# Altium PCB Espectrometro.PcbDoc
Units mil, origin at the board's own origin, x right, y up, seen from the top; angles counter-clockwise.
Board outline 4010.02 x 6700.02 mil, 2 copper layers (Top Layer, Bottom Layer); 5 components, 20 nets, 126 pads, 2 vias.
Unrouted connection lines stored in the file: 5.
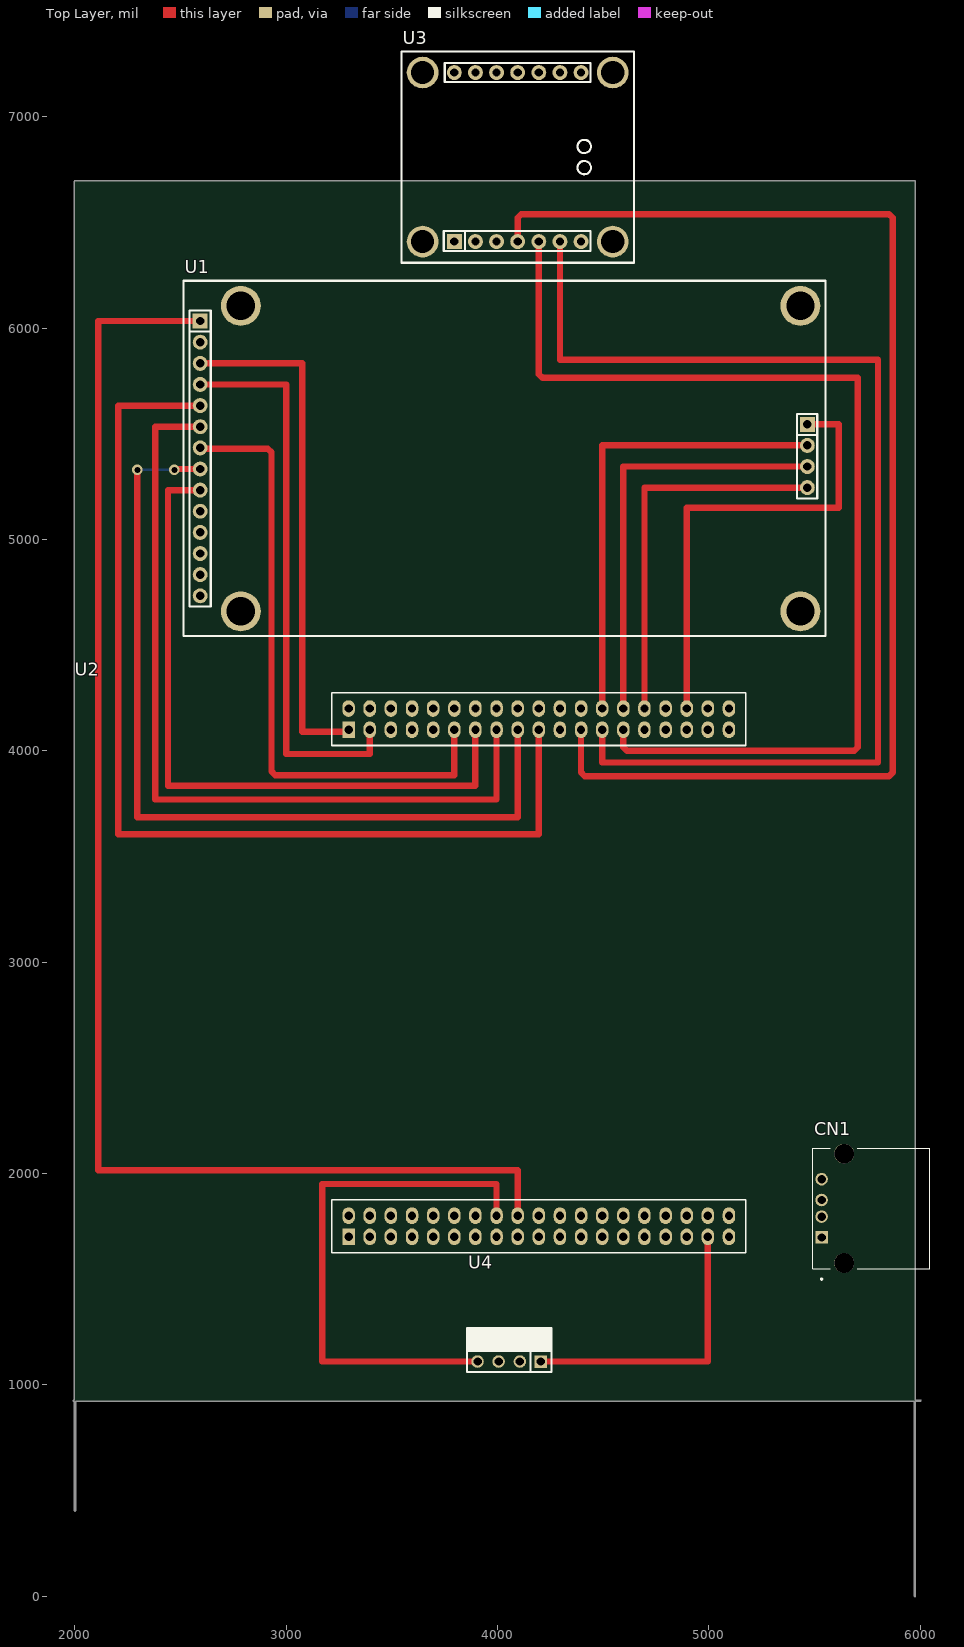
[diagram p0: Top Layer view]
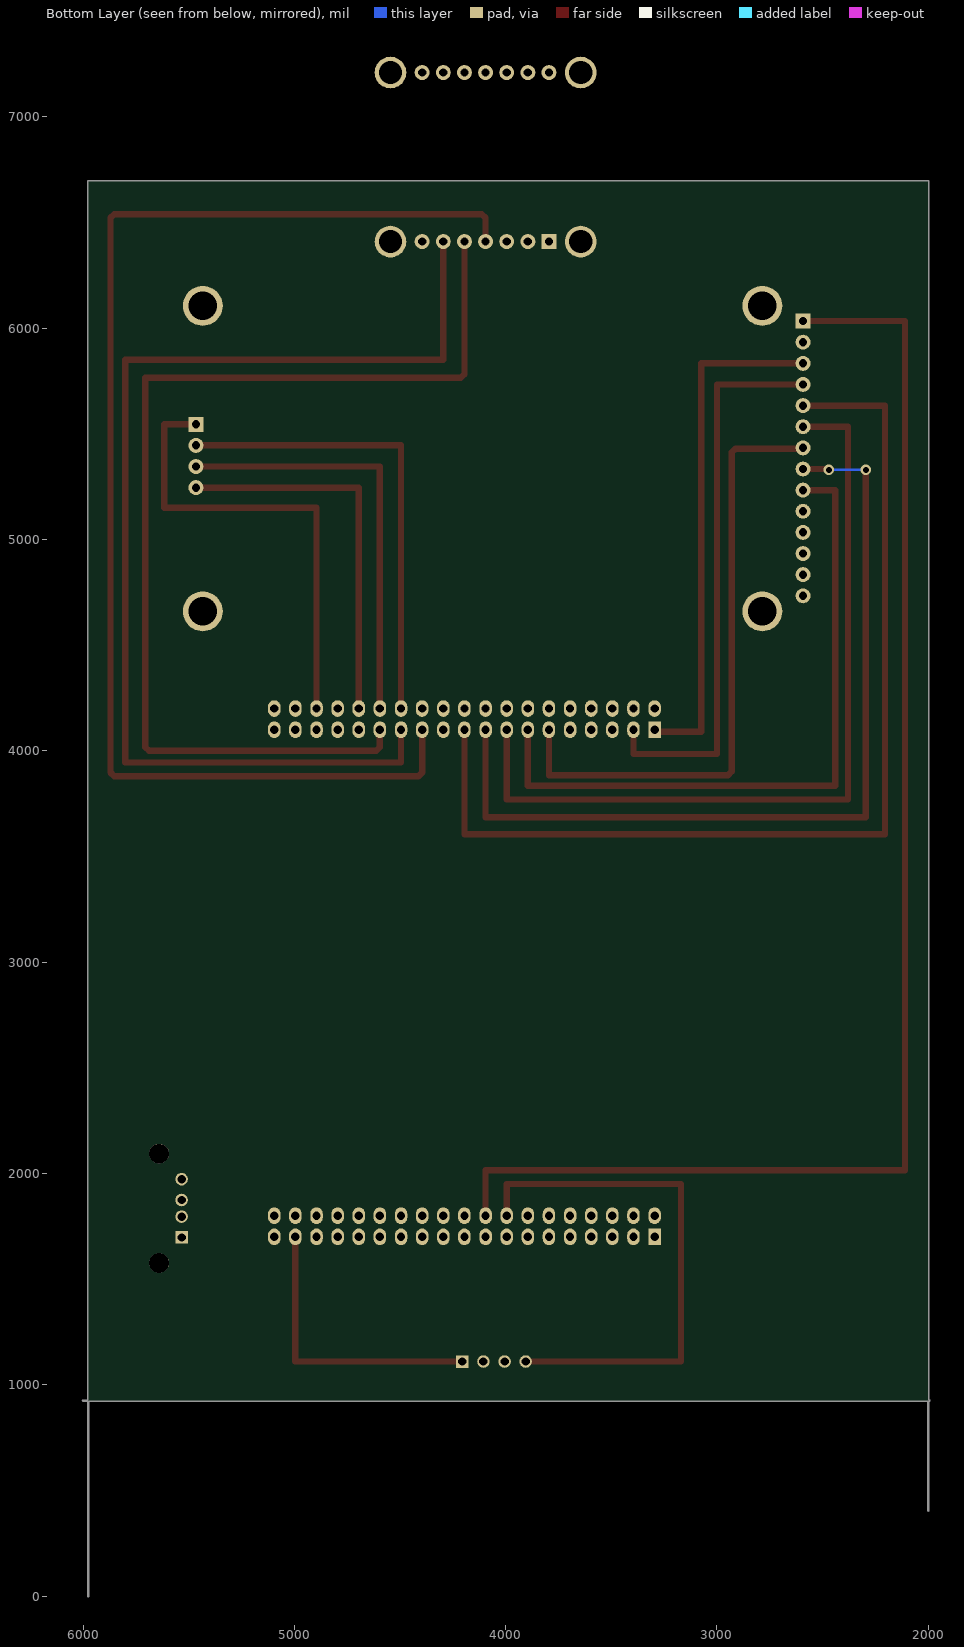
[diagram p1: Bottom Layer view, seen from below]

## Layer stack, top to bottom
Top Solder: solder mask 0.4, Solder Resist, Dk 3.5
Top Layer: signal copper 1.4
Dielectric 1: dielectric 12.6, FR-4, Dk 4.8
Bottom Layer: signal copper 1.4
Bottom Solder: solder mask 0.4, Solder Resist, Dk 3.5

## Board outline
1995,922.49 1997.48,922.49 1997.48,405 ccw(c2000,405) 2002.52,405 2002.52,922.49 5972.48,922.49 5972.48,0 ccw(c5975,0) 5977.52,0 5977.52,922.49 6000,922.49 ccw(c6000,925) 6002.52,925 ccw(c6000,925) 6000,927.51 5977.52,927.51 5977.52,6695 ccw(c5975,6695) 5975,6697.52 2000,6697.52 ccw(c2000,6695) 1997.48,6695 1997.48,927.51 1995,927.51 ccw(c1995,925)

## Design rules (kind name [scope] priority, off if disabled: settings)
Clearance [All] p1: gap=10 ignorepadtopadclearanceinfootprint=FALSE except(0: Arc-Hole Track-Hole SMDPad-Hole THPad-Hole Via-Hole Fill-Hole Poly-Hole Region-Hole Text-Hole)
PolygonConnect [All] p1: connectstyle=Relief reliefconductorwidth=10 reliefentries=4 polygonreliefangle="90 Angle" airgapwidth=10
RoutingVias [All] p1: holewidth=28 width=50 viastyle="Through Hole" minholewidth=28 minwidth=50 maxholewidth=28 maxwidth=50
SolderMaskExpansion [All] p1: expansion=4 istentingtop=FALSE
Width [All] p1: maxlimit=50 minlimit=10 preferedwidth=30 bottomlayer_maxwidth=10 bottomlayer_prefwidth=10 minimp=50.000000 maximp=50.000000 favimp=50.000000
30 further rules are at their usual default settings.

## Classes and differential pairs
component class Perifericos: CN1 U1 U3 U4
component class NUCLEO: U2

## Components (designator, comment, footprint, x,y, rotation, side; value= is the part's Value field where it differs from the comment)
CN1 "Conector USB" USB-A1HSW6 5640,1835 r90 top
U1 "PantallaTFT" "Pantalla_TFT_2.4\"" 2512.56,6223.78 r270 top locked
U2 "NUCLEO STM32F446RE" "NUCLEO - STM32F446RE - UP" 5095,1700 r90 top locked
U3 "Sens_6_Channel" AS7262 4095,6810 r0 top
U4 "LDR" "HEADER_M-4x1_0.1\"_H" 4055,1110 r180 top

## Footprints (in the part's own frame and the unit in brackets; to place one, negate y for a bottom-side part, rotate by r counter-clockwise, add the part's x,y. Pads: shape width x height; smd on the part's side, far side on the other; paste and mask are expansions set on the pad)
AS7262 [mm] "AS7262 Sensor 6 Channels"
  rect 1.8x1.8 hole 1: 1(-7.62,-10.16)
  round 1.8 hole 1: 2(-5.08,-10.16) 3(-2.54,-10.16) 4(0,-10.16) 5(2.54,-10.16) 6(5.08,-10.16) 7(7.62,-10.16) 8(-7.62,10.16) 9(-5.08,10.16) 10(-2.54,10.16) 11(0,10.16) 12(2.54,10.16) 13(5.08,10.16) 14(7.62,10.16)
  round 3.81 hole 2.794: 15(11.43,10.16) 16(-11.43,10.16) 17(-11.43,-10.16) 18(11.43,-10.16)
  silkscreen extent -13.97,-12.7 13.97,12.7, body extent -14.1,-12.83 14.1,12.83
"HEADER_M-4x1_0.1\"_H" [mm] "Tira de pines 4x1. Paso de 2.54mm. Horizontal."
  rect 1.5x1.5 hole 1.016: 1(-3.81,0)
  round 1.5 hole 1.016: 2(-1.27,0) 3(1.27,0) 4(3.81,0)
  silkscreen extent -5.08,-4 5.08,1.27, body extent -5.08,-9.94 5.08,0.29, height 3.76
"NUCLEO - STM32F446RE - UP" [mm] "NUCLEO - STM32F446RE - UP"
  rect 2x1.5 hole 1: 1(0,45.72) 39(60.96,45.72)
  oval 2x1.5 hole 1: 2(2.54,45.72) 3(0,43.18) 4(2.54,43.18) 5(0,40.64) 6(2.54,40.64) 7(0,38.1) 8(2.54,38.1) 9(0,35.56) 10(2.54,35.56) 11(0,33.02) 12(2.54,33.02) 13(0,30.48) 14(2.54,30.48) 15(0,27.94) 16(2.54,27.94) 17(0,25.4) 18(2.54,25.4) 19(0,22.86) 20(2.54,22.86) 21(0,20.32) 22(2.54,20.32) 23(0,17.78) 24(2.54,17.78) 25(0,15.24) 26(2.54,15.24) 27(0,12.7) 28(2.54,12.7) 29(0,10.16) 30(2.54,10.16) 31(0,7.62) 32(2.54,7.62) 33(0,5.08) 34(2.54,5.08) 35(0,2.54) 36(2.54,2.54) 37(0,0) 38(2.54,0) 40(63.5,45.72) 41(60.96,43.18) 42(63.5,43.18) 43(60.96,40.64) 44(63.5,40.64) 45(60.96,38.1) 46(63.5,38.1) 47(60.96,35.56) 48(63.5,35.56) 49(60.96,33.02) 50(63.5,33.02) 51(60.96,30.48) 52(63.5,30.48) 53(60.96,27.94) 54(63.5,27.94) 55(60.96,25.4) 56(63.5,25.4) 57(60.96,22.86) 58(63.5,22.86) 59(60.96,20.32) 60(63.5,20.32) 61(60.96,17.78) 62(63.5,17.78) 63(60.96,15.24) 64(63.5,15.24) 65(60.96,12.7) 66(63.5,12.7) 67(60.96,10.16) 68(63.5,10.16) 69(60.96,7.62) 70(63.5,7.62) 71(60.96,5.08) 72(63.5,5.08) 73(60.96,2.54) 74(63.5,2.54) 75(60.96,0) 76(63.5,0)
  silkscreen extent -1.91,-2.03 65.41,47.75, body extent -3.32,-5.08 66.67,78.87, height 12.28
"Pantalla_TFT_2.4\"" [mm] "Pantalla TFT 2.4\""
  rect 1.8x1.8 hole 1: 1(4.826,2.032) 15(17.23,75.01)
  round 1.8 hole 1: 2(7.366,2.032) 3(9.906,2.032) 4(12.446,2.032) 5(14.986,2.032) 6(17.526,2.032) 7(20.066,2.032) 8(22.606,2.032) 9(25.146,2.032) 10(27.686,2.032) 11(30.226,2.032) 12(32.766,2.032) 13(35.306,2.032) 14(37.846,2.032) 16(19.77,75.01) 17(22.31,75.01) 18(24.85,75.01)
  round 4.8 hole 3.4: 19(3,74.18) 20(39.72,74.18) 21(3,6.92) 22(39.72,6.92)
  silkscreen extent -0.02,0.03 42.7,77.22, body extent -0.02,0 42.67,77.15, height 5.8
USB-A1HSW6 [mm]
  rect 1.508x1.508 / inner round 1.508 / far side rect 1.508x1.508 hole 1: 1(-3.5,2.71)
  round 1.508 hole 1: 2(-1,2.71) 3(1,2.71) 4(3.5,2.71)
  round 2.38 hole 2.38 unplated: ""(-6.57,0) ""(6.57,0)
  silkscreen extent -8.61,-10.3 7.25,3.8, body extent -7.77,-10.3 8.03,3.8, height 7.6

## Part data
U1: "Pantalla TFT 2.4\""
U3: library part AS7262, "Sensor 6 Channels"
U4: "Sensor LDR para medir Int.Luz"

## Via types
v1: diameter 50, hole 28, Top Layer to Bottom Layer, 2 vias

## Nets (pads, with @x,y where several pads share a name; then routed paths per layer and width w, separated by ;. In a path a pad name is that pad's centre, name@x,y a point inside that pad or via, vN(x,y) a via of type N, cw(c..) or ccw(c..) an arc to the next point about the centre after c; other vN are vias at no path point)
+3.3V: U2.16 U3.1 U4.4 | length 2550
  Top Layer w30: U4.4 3170,1110 3170,1950 3995,1950 U2.16
+5V: U1.1 U2.18 | length 6701.3
  Top Layer w30: U1.1 2110,6033.78 2110,2015 4095,2015 U2.18
ADC_Luz: U2.35 U4.1 | length 1380
  Top Layer w30: U4.1 4995,1110 U2.35
Espect_RST: U2.63 U3.6 | length 5430
  Top Layer w30: U3.6 4295,5850 5800,5850 5800,3945 4495,3945 U2.63
Espect_SCL: U2.61 U3.4 | length 6218.8
  Top Layer w30: U3.4 4095,6522.43 4112.57,6540 5852.43,6540 5870,6522.43 5870,3897.57 5852.43,3880 4412.57,3880 4395,3897.57 U2.61
Espect_SDA: U2.65 U3.5 | length 5099.1
  Top Layer w30: U3.5 4195,5782.57 4212.57,5765 5705,5765 5705,4017.57 5687.43,4000 4612.57,4000 4595,4017.57 U2.65
GND: U1.2 U3.3 U4.3
SD_CS: U1.15 U2.72 | length 2214.7
  Top Layer w30: U2.72 4895,5150 5615,5150 5615,5545.43 U1.15
SD_SCK: U1.18 U2.68 | length 1816.1
  Top Layer w30: U2.68 4695,5245.43 U1.18
SD_SDI: U1.16 U2.64 | length 2216.1
  Top Layer w30: U2.64 4495,5445.43 U1.16
SD_SDO: U1.17 U2.66 | length 2016.1
  Top Layer w30: U2.66 4595,5345.43 U1.17
TFT_CS: U1.3 U2.39 | length 2456.2
  Top Layer w30: U1.3 3075,5833.78 3075,4090 3295,4090 U2.39
TFT_DC: U1.5 U2.57 | length 4901.3
  Top Layer w30: U1.5 2205,5633.78 2205,3605 4195,3605 U2.57
TFT_LED: U1.8 U2.55 | length 4161.3
  Top Layer w30: v1(2295,5330) 2295,3685 4095,3685 U2.55 ; v1(2470,5330) 2470,5333.78 U1.8
  Bottom Layer w10: v1(2295,5330) v1(2470,5330)
TFT_RST: U1.4 U2.41 | length 2671.6
  Top Layer w30: U1.4@2596.34,5730 U1.4 3000,5733.78 3000,3985 3395,3985 U2.41
TFT_SCK: U1.7 U2.49 | length 2943.4
  Top Layer w30: U1.7 2596.34,5430 2912.43,5430 2930,5412.43 2930,3902.57 2947.57,3885 3795,3885 U2.49
TFT_SDI: U1.6 U2.53 | length 3921.3
  Top Layer w30: U1.6 2380,5533.78 2380,3770 3995,3770 U2.53
TFT_SDO: U1.9 U2.51 | length 3271.3
  Top Layer w30: U1.9 2440,5233.78 2440,3835 3895,3835 U2.51
USB_Minus: CN1.2 U2.52
USB_Plus: CN1.3 U2.50
pads on no net: CN1. CN1.1 CN1.4 U1.10 U1.11 U1.12 U1.13 U1.14 U1.19 U1.20 U1.21 U1.22 U2.1 U2.2 U2.3 U2.4 U2.5 U2.6 U2.7 U2.8 U2.9 U2.10 U2.11 U2.12 U2.13 U2.14 U2.15 U2.17 U2.19 U2.20 U2.21 U2.22 U2.23 U2.24 U2.25 U2.26 U2.27 U2.28 U2.29 U2.30 U2.31 U2.32 U2.33 U2.34 U2.36 U2.37 U2.38 U2.40 U2.42 U2.43 U2.44 U2.45 U2.46 U2.47 U2.48 U2.54 U2.56 U2.58 U2.59 U2.60 U2.62 U2.67 U2.69 U2.70 U2.71 U2.73 U2.74 U2.75 U2.76 U3.2 U3.7 U3.8 U3.9 U3.10 U3.11 U3.12 U3.13 U3.14 U3.15 U3.16 U3.17 U3.18 U4.2

## Silkscreen, mask and mechanical layers (free items; w line width, h text height)
Mechanical 1:
  lines w5: 1995,925 2025,925 3018.75,925 5006.25,925 6000,925 ; 2000,0 2000,405 2000,6695 5975,6695 5975,0